# EAGLE board CT_schematic (EAGLE 7.6.0)

Size 100 x 80 mm. Coordinates in mm from the lower left corner, seen from the top.
Outline: 0,0 100,0 100,80 0,80 0,0
Copper layers (1*16): Top 0.035mm / dielectric 1.5mm / Bottom 0.035mm
Design rules "default": minimum track width 10mil, minimum drill 24mil, track to track 8mil, track to pad 8mil, pad to pad 8mil, via to via 8mil, smd to smd 8mil, copper to edge 40mil, drill to drill 8mil, minimum pad ring 10mil, minimum via ring 8mil, stop-mask expansion 4mil, vias tented up to drill 0mil, thermal gap 10mil

## Footprints (pad centres in the part's own frame; a part is rotated, then mirrored left to right if it is on the bottom)
C0603 = smd 0.8 x 0.8: 1 -0.762,0; 2 0.762,0
C0402 = smd 0.5 x 0.5: 1 -0.508,0; 2 0.508,0
C0805 = smd 1.2 x 1.3: 1 -1.016,0; 2 1.016,0
2220 = smd 1.85 x 5.5: 1 -2.55,0; 2 2.55,0
C1210 = smd 1.2 x 2.5: 1 -1.524,0; 2 1.524,0
C1206 = smd 1.3 x 1.6: 1 -1.524,0; 2 1.524,0
L0603 = smd 0.8 x 0.8: 1 -0.762,0; 2 0.762,0
R0603 = smd 0.8 x 0.8: 1 -0.762,0; 2 0.762,0
LQFP144 = smd 0.35 x 1.35: 1 -8.75,-10.625; 2 -8.25,-10.625; 3 -7.75,-10.625; 4 -7.25,-10.625; 5 -6.75,-10.625; 6 -6.25,-10.625; 7 -5.75,-10.625; 8 -5.25,-10.625; 9 -4.75,-10.625; 10 -4.25,-10.625; 11 -3.75,-10.625; 12 -3.25,-10.625; 13 -2.75,-10.62; 14 -2.25,-10.625; 15 -1.75,-10.625; 16 -1.25,-10.625; 17 -0.75,-10.625; 18 -0.25,-10.625; 19 0.25,-10.625; 20 0.75,-10.625; 21 1.25,-10.625; 22 1.75,-10.625; 23 2.25,-10.625; 24 2.75,-10.62; 25 3.25,-10.625; 26 3.75,-10.625; 27 4.25,-10.625; 28 4.75,-10.625; 29 5.25,-10.625; 30 5.75,-10.625; 31 6.25,-10.625; 32 6.75,-10.625; 33 7.25,-10.625; 34 7.75,-10.625; 35 8.25,-10.625; 36 8.75,-10.625; 73 8.75,10.625; 74 8.25,10.625; 75 7.75,10.625; 76 7.25,10.625; 77 6.75,10.625; 78 6.25,10.625; 79 5.75,10.625; 80 5.25,10.625; 81 4.75,10.625; 82 4.25,10.625; 83 3.75,10.625; 84 3.25,10.625; 85 2.75,10.625; 86 2.25,10.625; 87 1.75,10.625; 88 1.25,10.625; 89 0.75,10.625; 90 0.25,10.625; 91 -0.25,10.625; 92 -0.75,10.625; 93 -1.25,10.625; 94 -1.75,10.625; 95 -2.25,10.625; 96 -2.75,10.625; 97 -3.25,10.625; 98 -3.75,10.625; 99 -4.25,10.625; 100 -4.75,10.625; 101 -5.25,10.625; 102 -5.75,10.625; 103 -6.25,10.625; 104 -6.75,10.625; 105 -7.25,10.625; 106 -7.75,10.625; 107 -8.25,10.625; 108 -8.75,10.625 | smd 1.35 x 0.35: 37 10.625,-8.75; 38 10.625,-8.25; 39 10.625,-7.75; 40 10.625,-7.25; 41 10.625,-6.75; 42 10.625,-6.25; 43 10.625,-5.75; 44 10.625,-5.25; 45 10.625,-4.75; 46 10.625,-4.25; 47 10.625,-3.75; 48 10.625,-3.25; 49 10.625,-2.75; 50 10.625,-2.25; 51 10.625,-1.75; 52 10.625,-1.25; 53 10.625,-0.75; 54 10.625,-0.25; 55 10.625,0.25; 56 10.625,0.75; 57 10.625,1.25; 58 10.625,1.75; 59 10.625,2.25; 60 10.625,2.75; 61 10.625,3.25; 62 10.625,3.75; 63 10.625,4.25; 64 10.625,4.75; 65 10.625,5.25; 66 10.625,5.75; 67 10.625,6.25; 68 10.625,6.75; 69 10.625,7.25; 70 10.625,7.75; 71 10.625,8.25; 72 10.625,8.75; 109 -10.625,8.75; 110 -10.625,8.25; 111 -10.625,7.75; 112 -10.625,7.25; 113 -10.625,6.75; 114 -10.625,6.25; 115 -10.625,5.75; 116 -10.625,5.25; 117 -10.625,4.75; 118 -10.625,4.25; 119 -10.625,3.75; 120 -10.625,3.25; 121 -10.625,2.75; 122 -10.625,2.25; 123 -10.625,1.75; 124 -10.625,1.25; 125 -10.625,0.75; 126 -10.625,0.25; 127 -10.625,-0.25; 128 -10.625,-0.75; 129 -10.625,-1.25; 130 -10.625,-1.75; 131 -10.625,-2.25; 132 -10.625,-2.75; 133 -10.625,-3.25; 134 -10.625,-3.75; 135 -10.625,-4.25; 136 -10.625,-4.75; 137 -10.625,-5.25; 138 -10.625,-5.75; 139 -10.625,-6.25; 140 -10.625,-6.75; 141 -10.625,-7.25; 142 -10.625,-7.75; 143 -10.625,-8.25; 144 -10.625,-8.75
ARDUCAM = drill 1 pad 1.8 square: 1 0,0 | drill 1 pad 1.8: 2 0,2.54; 3 2.54,0; 4 2.54,2.54; 5 5.08,0; 6 5.08,2.54; 7 7.62,0; 8 7.62,2.54; 9 10.16,0; 10 10.16,2.54; 11 12.7,0; 12 12.7,2.54; 13 15.24,0; 14 15.24,2.54; 15 17.78,0; 16 17.78,2.54; 17 20.32,0; 18 20.32,2.54; 19 22.86,0; 20 22.86,2.54
SAMTEC_FTSH-105-01-L-DV-K = smd 0.762 x 2.794: 1 -2.54,-2.032; 2 -2.54,2.032; 3 -1.27,-2.032; 4 -1.27,2.032; 5 0,-2.032; 6 0,2.032; 7 1.27,-2.032; 8 1.27,2.032; 9 2.54,-2.032; 10 2.54,2.032
USON-8 = smd 0.3 x 0.4: 1 0,0; 2 0.5,0; 3 1,0; 4 1.5,0; 5 1.5,2.4; 6 1,2.4; 7 0.5,2.4; 8 0,2.4 | smd 1.65 x 0.25: 9 0.75,1.2
TH58NVG3S0HBAI4 = smd 0.46 x 0.46: A1 -5.6,2.4; A2 -5.6,1.6; A9 -5.6,-5.6; A10 -5.6,-6.4; B1 -4.8,2.4; B9 -4.8,-5.6; B10 -4.8,-6.4; C3 -4,0.8; C4 -3.2,0.8; C5 -2.4,0.8; C6 -1.6,0.8; C7 -0.8,0.8; C8 0,0.8; D3 -4,0; D4 -3.2,0; D5 -2.4,0; D6 -1.6,0; D7 -0.8,0; D8 0,0; E3 -4,-0.8; E4 -3.2,-0.8; E5 -2.4,-0.8; E6 -1.6,-0.8; E7 -0.8,-0.8; E8 0,-0.8; F3 -4,-1.6; F4 -3.2,-1.6; F5 -2.4,-1.6; F6 -1.6,-1.6; F7 -0.8,-1.6; F8 0,-1.6; G3 -4,-2.4; G4 -3.2,-2.4; G5 -2.4,-2.4; G6 -1.6,-2.4; G7 -0.8,-2.4; G8 0,-2.4; H3 -4,-3.2; H4 -3.2,-3.2; H5 -2.4,-3.2; H6 -1.6,-3.2; H7 -0.8,-3.2; H8 0,-3.2; J3 -4,-4; J4 -3.2,-4; J5 -2.4,-4; J6 -1.6,-4; J7 -0.8,-4; J8 0,-4; K3 -4,-4.8; K4 -3.2,-4.8; K5 -2.4,-4.8; K6 -1.6,-4.8; K7 -0.8,-4.8; K8 0,-4.8; L1 0.8,2.4; L2 0.8,1.6; L9 0.8,-5.6; L10 0.8,-6.4; M1 1.6,2.4; M2 1.6,1.6; M9 1.6,-5.6; M10 1.6,-6.4
FCI_10118193-0001LF = smd 0.4 x 1.35: 1 -1.3,2.675; 2 -0.65,2.675; 3 0,2.675; 4 0.65,2.675; 5 1.3,2.675 | smd 1.6 x 1.4: 6 -3.2,2.45; 7 3.2,2.45 | smd 1.9 x 1.9: 8 -1.2,0; 9 1.2,0 | hole 0.5: -3.3,0; 3.3,0
SOT143B = smd 1 x 0.7: 1 -0.75,-1 | smd 0.6 x 0.7: 2 0.95,-1; 3 0.95,1; 4 -0.95,1
ABS07-32.768KHZ-7-T = smd 1.1 x 2.4: 1 -2.5,0; 2 0,0
ABLS-25.000MHZ-B2F-T = smd 5.6 x 2.8: 1 -3.81,0; 2 5.69,0
ASFL1 = smd 1.7 x 1.5: 1 -1.27,-1.1; 2 1.27,-1.1; 3 1.27,1.1; 4 -1.27,1.1
MSOP-8_EP = smd 1.422 x 0.508: 1 -2.095,0.975; 2 -2.095,0.325; 3 -2.095,-0.325; 4 -2.095,-0.975; 5 2.095,-0.975; 6 2.095,-0.325; 7 2.095,0.325; 8 2.095,0.975 | smd 1.727 x 1.702: EPAD 0,0
SOIC-8_EP = smd 1.6 x 0.533: 1 -2.921,1.905; 2 -2.921,0.635; 3 -2.921,-0.635; 4 -2.921,-1.905; 5 2.921,-1.905; 6 2.921,-0.635; 7 2.921,0.635; 8 2.921,1.905 | smd 2.54 x 3.302: EPAD 0,0 | drill 0.406 pad 0.406: P$1 -0.508,0.635; P$2 0.381,0.635; P$3 -0.508,-0.635; P$4 0.381,-0.635
DFN8_2X3MC = smd 0.813 x 0.305: 1 -1.398,0.75; 2 -1.398,0.25; 3 -1.398,-0.25; 4 -1.398,-0.75; 5 1.398,-0.75; 6 1.398,-0.25; 7 1.398,0.25; 8 1.398,0.75 | smd 1.753 x 1.549: 9 0,0
JST-2-SMD = smd 1 x 4.6: 1 -1,-3.7; 2 1,-3.7 | smd 1.6 x 3.4: NC1 -3.4,1.5; NC2 3.4,1.5
SON-6 = smd 0.55 x 0.3: 1 -0.355,0.5 | smd 0.52 x 0.3: 2 -0.37,0; 3 -0.37,-0.5; 4 0.37,-0.5; 5 0.37,0; 6 0.37,0.5
SW_4-1437565-2 = smd 1.4 x 2.1: 1 -2.23,4.55; 2 -2.23,-4.55; 3 2.23,4.55; 4 2.23,-4.55
LGM67K-G1J2-24-Z = smd 0.8 x 1.4: A -2,0; C 0,0
NC7SZ125M5X = smd 1.3 x 0.7: 1 -1.3,0.95; 2 -1.3,0; 3 -1.3,-0.95; 4 1.3,-0.95; 5 1.3,0.95

## Placement (x,y rotation side)
C1  1e-06  [C0603]  -26.67,76.2 0 top  (outside the outline)
C2  1e-07  [C0603]  -30.48,76.2 0 top  (outside the outline)
C3  1e-07  [C0603]  -34.29,76.2 0 top  (outside the outline)
C4  1e-07  [C0603]  -38.1,76.2 0 top  (outside the outline)
C5  1e-07  [C0603]  -41.91,76.2 0 top  (outside the outline)
C6  1e-07  [C0603]  -45.72,76.2 0 top  (outside the outline)
C7  1e-07  [C0603]  -49.53,76.2 0 top  (outside the outline)
C8  1e-07  [C0603]  -53.34,76.2 0 top  (outside the outline)
C9  1e-07  [C0603]  -57.15,76.2 0 top  (outside the outline)
C10  1e-07  [C0603]  -60.96,76.2 0 top  (outside the outline)
C11  1e-07  [C0603]  -64.77,76.2 0 top  (outside the outline)
C12  1e-07  [C0603]  -68.58,76.2 0 top  (outside the outline)
C13  1e-07  [C0603]  -72.39,76.2 0 top  (outside the outline)
C14  4.7e-06  [C0603]  -15.24,76.2 0 top  (outside the outline)
C15  2.2e-06  [C0603]  -19.05,76.2 0 top  (outside the outline)
C16  2.2e-06  [C0603]  -22.86,76.2 0 top  (outside the outline)
C17  1e-08  [C0603]  -76.2,76.2 0 top  (outside the outline)
C18  1e-06  [C0603]  -15.24,81.28 0 top  (outside the outline)
C19  1e-07  [C0603]  -19.05,81.28 0 top  (outside the outline)
C20  1e-07  [C0603]  -22.86,81.28 0 top  (outside the outline)
C21  1e-11  [C0402]  -68.58,81.28 0 top  (outside the outline)
C22  1e-11  [C0402]  -72.39,81.28 0 top  (outside the outline)
C23  1e-11  [C0402]  -76.2,81.28 0 top  (outside the outline)
C24  1e-11  [C0402]  -15.24,86.36 0 top  (outside the outline)
C26  1e-06  [C0603]  -26.67,81.28 0 top  (outside the outline)
C27  1e-07  [C0402]  -19.05,86.36 0 top  (outside the outline)
C28  1e-07  [C0402]  -22.86,86.36 0 top  (outside the outline)
C29  1e-05  [C0805]  -27.94,66.04 0 top  (outside the outline)
C30  1e-07  [C0402]  -26.67,86.36 0 top  (outside the outline)
C31  1e-07  [C0402]  -30.48,86.36 0 top  (outside the outline)
C32  1e-08  [C0402]  -34.29,86.36 0 top  (outside the outline)
C33  6.8e-05  [2220]  -68.58,27.94 0 top  (outside the outline)
C34  1e-06  [C0603]  -30.48,81.28 0 top  (outside the outline)
C35  6.8e-05  [2220]  -76.2,27.94 0 top  (outside the outline)
C36  1e-05  [C1210]  -29.21,58.42 0 top  (outside the outline)
C37  1e-05  [C1210]  -35.56,58.42 0 top  (outside the outline)
C38  1e-05  [C1210]  -41.91,58.42 0 top  (outside the outline)
C39  1e-05  [C1210]  -48.26,58.42 0 top  (outside the outline)
C40  1e-07  [C0402]  -38.1,86.36 0 top  (outside the outline)
C41  1e-05  [C1206]  -54.61,58.42 0 top  (outside the outline)
C42  1e-05  [C1206]  -60.96,58.42 0 top  (outside the outline)
C43  1e-08  [C0402]  -41.91,86.36 0 top  (outside the outline)
C44  1e-08  [C0402]  -45.72,86.36 0 top  (outside the outline)
C45  1e-08  [C0402]  -49.53,86.36 0 top  (outside the outline)
F1  240.0  [L0603]  -34.29,81.28 0 top  (outside the outline)
R2  1000.0  [R0603]  -38.1,81.28 0 top  (outside the outline)
R4  4700.0  [R0603]  -41.91,81.28 0 top  (outside the outline)
R5  4700.0  [R0603]  -45.72,81.28 0 top  (outside the outline)
R6  10000.0  [R0603]  -67.31,66.04 0 top  (outside the outline)
R7  10000.0  [R0603]  -72.39,66.04 0 top  (outside the outline)
R8  10000.0  [R0603]  -77.47,66.04 0 top  (outside the outline)
R9  10000.0  [R0603]  -15.24,71.12 0 top  (outside the outline)
R10  10000.0  [R0603]  -20.32,71.12 0 top  (outside the outline)
R11  10000.0  [R0603]  -25.4,71.12 0 top  (outside the outline)
R12  5.0  [R0603]  -49.53,81.28 0 top  (outside the outline)
R13  100000.0  [R0603]  -41.91,66.04 0 top  (outside the outline)
R14  100000.0  [R0603]  -46.99,66.04 0 top  (outside the outline)
R15  100000.0  [R0603]  -52.07,66.04 0 top  (outside the outline)
R16  10000.0  [R0603]  -30.48,71.12 0 top  (outside the outline)
R17  10000.0  [R0603]  -35.56,71.12 0 top  (outside the outline)
R18  10000.0  [R0603]  -40.64,71.12 0 top  (outside the outline)
R19  10000.0  [R0603]  -45.72,71.12 0 top  (outside the outline)
R20  10000.0  [R0603]  -50.8,71.12 0 top  (outside the outline)
R21  3900.0  [R0603]  -53.34,81.28 0 top  (outside the outline)
R22  2200.0  [R0603]  -57.15,81.28 0 top  (outside the outline)
R23  10000.0  [R0603]  -55.88,71.12 0 top  (outside the outline)
R24  4031.5447154472  [R0603]  -36.83,66.04 0 top  (outside the outline)
R25  2200.0  [R0603]  -60.96,81.28 0 top  (outside the outline)
R26  10000.0  [R0603]  -60.96,71.12 0 top  (outside the outline)
R27  10000.0  [R0603]  -66.04,71.12 0 top  (outside the outline)
R28  82000.0  [R0603]  -71.12,71.12 0 top  (outside the outline)
R29  300000.0  [R0603]  -57.15,66.04 0 top  (outside the outline)
R30  120000.0  [R0603]  -62.23,66.04 0 top  (outside the outline)
R31  2000.0  [R0603]  -64.77,81.28 0 top  (outside the outline)
R32  10000.0  [R0603]  -76.2,71.12 0 top  (outside the outline)
U1  STM32F765ZGT7  [LQFP144]  -24.13,11.43 0 top  (outside the outline)
U2  arducam_ov2640  [ARDUCAM]  -59.69,49.53 0 top  (outside the outline)
U3  FTSH-105-01-L-DV-K  [SAMTEC_FTSH-105-01-L-DV-K]  -58.42,7.62 0 top  (outside the outline)
U4  SST26WF080BT-104I/NP  [USON-8]  -53.34,85.09 0 top  (outside the outline)
U5  TH58NVG3S0HBAI4  [TH58NVG3S0HBAI4]  -24.13,33.02 0 top  (outside the outline)
U6  10118193-0001LF  [FCI_10118193-0001LF]  -35.56,41.91 0 top  (outside the outline)
U7  prtr5v0u2ax  [SOT143B]  -66.04,86.36 0 top  (outside the outline)
U8  ABS07-32.768KHZ-7-T  [ABS07-32.768KHZ-7-T]  -27.94,52.07 0 top  (outside the outline)
U9  ABLS-25.000MHZ-B2F-T  [ABLS-25.000MHZ-B2F-T]  -54.61,41.91 0 top  (outside the outline)
U10  ASFL1-25MHZ-NCS  [ASFL1]  -26.67,43.18 0 top  (outside the outline)
U11  MIC47100YMME  [MSOP-8_EP]  -67.31,58.42 0 top  (outside the outline)
U12  MIC5234YME  [SOIC-8_EP]  -67.31,50.8 0 top  (outside the outline)
U13  MCP73831T-2ACI/MC  [DFN8_2X3MC]  -76.2,85.09 0 top  (outside the outline)
U14  S2B-PH-SM4-TB(LF)(SN)  [JST-2-SMD]  -59.69,29.21 0 top  (outside the outline)
U15  TPS3895ADRYR  [SON-6]  -69.85,85.09 0 top  (outside the outline)
U16  4-1437565-2  [SW_4-1437565-2]  -45.72,29.21 0 top  (outside the outline)
U17  Q65110A2395  [LGM67K-G1J2-24-Z]  -17.78,59.69 0 top  (outside the outline)
U18  nc7sz125m5x  [NC7SZ125M5X]  -73.66,58.42 0 top  (outside the outline)
U19  nc7sz125m5x  [NC7SZ125M5X]  -15.24,64.77 0 top  (outside the outline)
U20  nc7sz125m5x  [NC7SZ125M5X]  -21.59,64.77 0 top  (outside the outline)

## Library data of the parts
C1-C24 C26-C45 F1 R2 R4-R32 U1-U20 = circuit_tree

## Nets
CLK_CRYSTAL_U1_8: C21.1 U1.8 U8.1
CLK_CRYSTAL_U1_9: C22.1 U1.9 U8.2
CLK_CRYSTAL_U1_23: C23.1 U1.23 U9.1
CLK_CRYSTAL_U1_24: C24.1 U1.24 U9.2
CLK_U2_8: U2.8 U10.3
GND: C1.2 C2.2 C3.2 C4.2 C5.2 C6.2 C7.2 C8.2 C9.2 C10.2 C11.2 C12.2 C13.2 C14.2 C15.2 C16.2 C17.2 C18.2 C19.2 C20.2 C21.2 C22.2 C23.2 C24.2 C26.2 C27.2 C28.2 C29.2 C30.2 C31.2 C32.2 C33.2 C34.2 C35.2 C36.2 C37.2 C38.2 C39.2 C40.2 C41.2 C42.2 C43.2 C44.2 C45.2 R2.2 R6.2 R11.2 R12.2 R22.2 R25.2 R28.2 R30.2 R31.2 U1.16 U1.31 U1.38 U1.51 U1.61 U1.83 U1.94 U1.107 U1.120 U1.130 U2.2 U2.20 U3.3 U3.5 U4.4 U4.9 U5.C5 U5.K3 U5.K8 U6.5 U6.6 U6.7 U6.8 U6.9 U7.1 U10.2 U11.3 U11.EPAD U12.7 U12.EPAD U13.6 U13.9 U14.2 U15.2 U17.C U18.2 U18.3 U19.1 U19.3 U20.1 U20.3
INPUT_USBPOWER_5V: C41.1 R32.2 U6.1 U7.4 U13.1 U13.2
NET_U1_25: R4.1 U1.25 U19.4
NET_U1_33: C17.1 C18.1 F1.1 U1.32 U1.33
NET_U1_71: C15.1 U1.71
NET_U1_106: C16.1 U1.106
NET_U1_138: R6.1 U1.138
NET_U1_141: U17.A
NET_U1_142: U16.3 U16.4
NET_U1_143: R7.1 U1.143
NET_U2_19: R5.1 U2.19 U20.4
NET_U3_9: R12.1 U3.9
NET_U5_C3: R19.1 U5.C3
NET_U5_C6: R16.1 U5.C6
NET_U5_C7: R18.1 U5.C7
NET_U5_C8: R20.1 U5.C8
NET_U5_D4: R17.1 U5.D4
NET_U11_6: R21.2 R22.1 U11.6
NET_U12_4: R24.2 R25.1 U12.4
NET_U13_5: R32.1 U13.5
NET_U13_8: R31.1 U13.8
NET_U15_1: R27.1 R28.1 U15.1
NET_U15_3: R29.2 R30.1 U15.3
NET_U15_4: R26.1 U15.4 U18.4 U19.2 U20.2
NET_U16_1: R2.1 U16.1 U16.2
PROC_QUADSPI_BK1_IO0: U1.20 U4.5
PROC_QUADSPI_BK1_IO1: U1.21 U4.2
PROC_QUADSPI_BK1_IO2: R14.1 U1.1 U4.3
PROC_QUADSPI_BK1_IO3: R15.1 U1.18 U4.7
PROC_QUADSPI_BK1_NCS: R13.1 U1.69 U4.1
PROC_QUADSPI_CLK: U1.22 U4.6
PROC_SYS_JTCK_SWCLK: R11.1 U1.109 U3.4
PROC_SYS_JTDI: R9.1 U1.110 U3.8
PROC_SYS_JTDO_SWO: U1.133 U3.6
PROC_SYS_JTMS_SWDIO: R10.1 U1.105 U3.2
PROC_USB_OTG_FS_DM: U6.2 U7.3
PROC_USB_OTG_FS_DP: U6.3 U7.2
RST_OUT_U3_JTAG_RST_B: R8.1 U3.10 U18.1
VCC_S1_3V7: C33.1 C34.1 C36.1 C37.1 C42.1 R23.1 R23.2 U11.1 U11.2 U11.4 U11.5 U12.5 U12.8 U13.3 U13.4 U14.1
VCC_TIER1_1V8: C1.1 C2.1 C3.1 C4.1 C5.1 C6.1 C7.1 C8.1 C9.1 C10.1 C11.1 C12.1 C13.1 C14.1 C19.1 C20.1 C27.1 C28.1 C35.1 C40.1 C43.1 C44.1 C45.1 F1.2 R4.2 R7.2 R8.2 R9.2 R10.2 R13.2 R14.2 R15.2 R21.1 R26.2 R27.2 R29.1 U1.6 U1.17 U1.30 U1.39 U1.52 U1.62 U1.72 U1.84 U1.95 U1.108 U1.121 U1.131 U1.144 U3.1 U4.8 U11.7 U11.8 U15.6 U18.5 U19.5 U20.5
VCC_TIER1_3V3: C26.1 C29.1 C30.1 C31.1 C32.1 C38.1 C39.1 R5.2 R16.2 R17.2 R18.2 R19.2 R20.2 R24.1 U2.1 U5.H8 U5.J6 U10.4 U12.1

## Tracks (layer width: path | path; a pad name or v marks a point on that pad's centre or on a via)
CLK_CRYSTAL_U1_8  (2 unrouted)
CLK_CRYSTAL_U1_9  (2 unrouted)
CLK_CRYSTAL_U1_23  (2 unrouted)
CLK_CRYSTAL_U1_24  (2 unrouted)
CLK_U2_8  (1 unrouted)
GND  (93 unrouted)
INPUT_USBPOWER_5V  (5 unrouted)
NET_U1_25  (2 unrouted)
NET_U1_33  (4 unrouted)
NET_U1_71  (1 unrouted)
NET_U1_106  (1 unrouted)
NET_U1_138  (1 unrouted)
NET_U1_142  (1 unrouted)
NET_U1_143  (1 unrouted)
NET_U2_19  (2 unrouted)
NET_U3_9  (1 unrouted)
NET_U5_C3  (1 unrouted)
NET_U5_C6  (1 unrouted)
NET_U5_C7  (1 unrouted)
NET_U5_C8  (1 unrouted)
NET_U5_D4  (1 unrouted)
NET_U11_6  (2 unrouted)
NET_U12_4  (2 unrouted)
NET_U13_5  (1 unrouted)
NET_U13_8  (1 unrouted)
NET_U15_1  (2 unrouted)
NET_U15_3  (2 unrouted)
NET_U15_4  (4 unrouted)
NET_U16_1  (2 unrouted)
PROC_QUADSPI_BK1_IO0  (1 unrouted)
PROC_QUADSPI_BK1_IO1  (1 unrouted)
PROC_QUADSPI_BK1_IO2  (2 unrouted)
PROC_QUADSPI_BK1_IO3  (2 unrouted)
PROC_QUADSPI_BK1_NCS  (2 unrouted)
PROC_QUADSPI_CLK  (1 unrouted)
PROC_SYS_JTCK_SWCLK  (2 unrouted)
PROC_SYS_JTDI  (2 unrouted)
PROC_SYS_JTDO_SWO  (1 unrouted)
PROC_SYS_JTMS_SWDIO  (2 unrouted)
PROC_USB_OTG_FS_DM  (1 unrouted)
PROC_USB_OTG_FS_DP  (1 unrouted)
RST_OUT_U3_JTAG_RST_B  (2 unrouted)
VCC_S1_3V7  (15 unrouted)
VCC_TIER1_1V8  (56 unrouted)
VCC_TIER1_3V3  (18 unrouted)